# Allegro board my_demoa2.brd
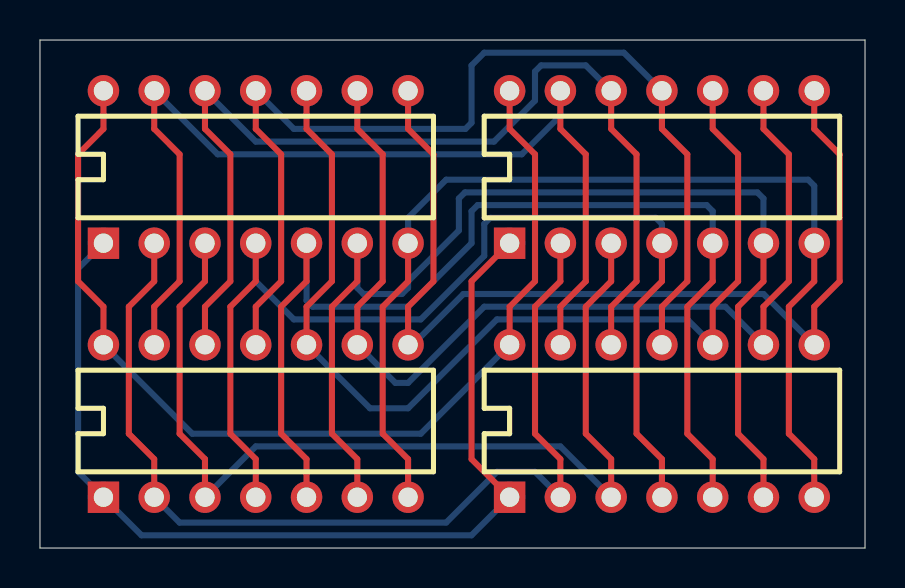
[diagram p0: board, top side]
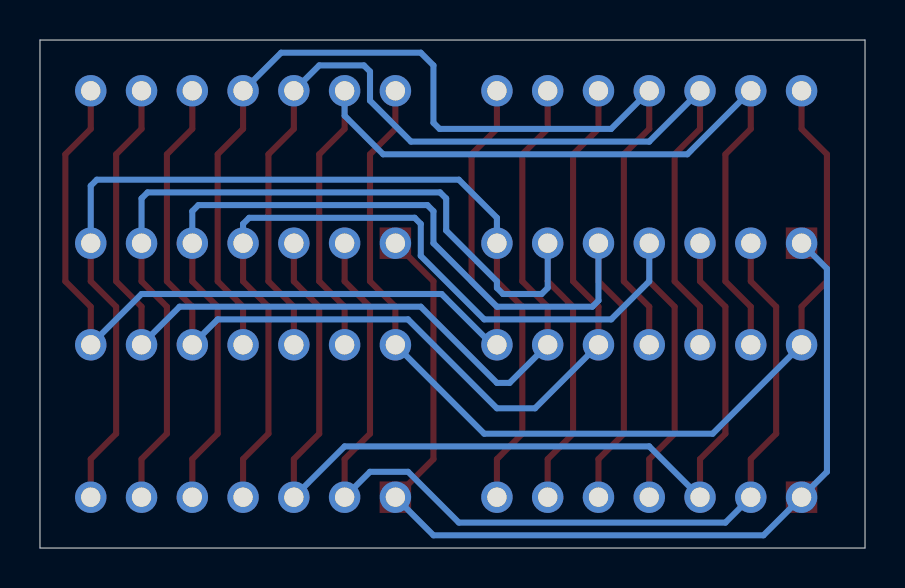
[diagram p1: board, bottom side, seen from below]

Outline 41.27 x 25.4 mm; copper layers: TOP, GND, POWER, INNER1, INNER2, BOTTOM. Coordinates in mm from the lower left corner of the outline.
Outline path: 0,25.4 0,0 41.27,0 41.27,25.4 0,25.4

## Design rules (mm)
nets with their own width: min track width 0.305; nets DAT1 DAT2 DAT3 DAT4 DAT5 DAT6 DAT7 DAT8 DAT9 DAT10 DAT11 DAT12 GND VCC

## Placement (name value [footprint] x y rotation side)
U1  7400  [DIP14]  3.17 15.24 0 top
U2  7400  [DIP14]  23.5 15.24 0 top
U3  7400  [DIP14]  3.17 2.54 0 top
U4  7400  [DIP14]  23.5 2.54 0 top

## Library data of the parts
U1-U4 = 7400

## Footprints (pads in the part's own frame, mm; a bottom-side part is the same pattern mirrored in y, then rotated)
DIP14
  rect 1.575x1.575 hole 0.965: 1(0,0)
  round 1.575 hole 0.965: 2(2.54,0) 3(5.08,0) 4(7.62,0) 5(10.16,0) 6(12.7,0) 7(15.24,0) 8(15.24,7.62) 9(12.7,7.62) 10(10.16,7.62) 11(7.62,7.62) 12(5.08,7.62) 13(2.54,7.62) 14(0,7.62)

## Nets
GND: U1.7(TP-7) U2.7(TP-7) U3.7(TP-7) U4.7(TP-7)
VCC: U1.14(TP-14) U2.14(TP-14) U3.14(TP-14) U4.14(TP-14)
DAT1: U1.2(TP-2) U2.2(TP-2) U3.2(TP-2) U4.2(TP-2)
DAT2: U1.1(TP-1) U2.1(TP-1) U3.1(TP-1) U4.1(TP-1)
DAT3: U1.3(TP-3) U2.3(TP-3) U3.3(TP-3) U4.3(TP-3)
DAT4: U1.5(TP-5) U2.5(TP-5) U3.5(TP-5) U4.5(TP-5)
DAT5: U1.4(TP-4) U2.4(TP-4) U3.4(TP-4) U4.4(TP-4)
DAT6: U1.6(TP-6) U2.6(TP-6) U3.6(TP-6) U4.6(TP-6)
DAT7: U1.10(TP-10) U2.10(TP-10) U3.10(TP-10) U4.10(TP-10)
DAT8: U1.9(TP-9) U2.9(TP-9) U3.9(TP-9) U4.9(TP-9)
DAT9: U1.8(TP-8) U2.8(TP-8) U3.8(TP-8) U4.8(TP-8)
DAT10: U1.13(TP-13) U2.13(TP-13) U3.13(TP-13) U4.13(TP-13)
DAT11: U1.12(TP-12) U2.12(TP-12) U3.12(TP-12) U4.12(TP-12)
DAT12: U1.11(TP-11) U2.11(TP-11) U3.11(TP-11) U4.11(TP-11)

## Routing (per net, layer and track width the routed paths; a pad name or vN(x,y) marks a point on that pad's centre or on a via; arc(x,y) is an arc through that point)
GND: length 52.9
  TOP w0.305: U1.7 18.42,13.34 17.15,12.06 17.15,5.71 18.42,4.45 U3.7 ; U4.7 38.73,4.45 37.46,5.71 37.46,12.06 38.73,13.34 U2.7
  BOTTOM w0.305: U2.7 38.73,18.11 38.43,18.41 20.32,18.41 18.42,16.51 U1.7
VCC: length 51.5
  TOP w0.305: U4.14 23.5,12.06 24.77,13.34 24.77,19.68 23.5,20.95 U2.14 ; U1.14 3.17,20.95 1.91,19.68 1.91,13.34 3.17,12.06 U3.14
  BOTTOM w0.305: U3.14 7.62,5.71 19.05,5.71 U4.14
DAT1: length 49.9
  TOP w0.305: U2.2 26.04,13.34 24.77,12.06 24.77,5.71 26.04,4.45 U4.2 ; U3.2 5.71,4.45 4.45,5.71 4.45,12.06 5.71,13.34 U1.2
  BOTTOM w0.305: U4.2 24.77,3.81 22.86,3.81 20.32,1.27 6.98,1.27 U3.2
DAT2: length 49.9
  TOP w0.305: U4.1 21.59,4.45 21.59,13.34 U2.1
  BOTTOM w0.305: U1.1 1.91,13.97 1.91,3.81 U3.1 5.08,0.64 21.59,0.64 U4.1
DAT3: length 49.9
  TOP w0.305: U1.3 8.26,13.34 6.98,12.06 6.98,5.71 8.26,4.45 U3.3 ; U4.3 28.58,4.45 27.31,5.71 27.31,12.06 28.58,13.34 U2.3
  BOTTOM w0.305: U3.3 10.79,5.08 26.04,5.08 U4.3
DAT4: length 55.6
  TOP w0.305: U3.5 13.33,4.45 12.06,5.71 12.06,12.06 13.33,13.34 U1.5 ; U4.5 33.66,4.45 32.38,5.71 32.38,12.06 33.66,13.34 U2.5
  BOTTOM w0.305: U1.5 13.33,12.37 13.64,12.06 18.42,12.06 21.59,15.24 21.59,16.84 21.89,17.14 33.35,17.14 33.66,16.84 U2.5
DAT5: length 54.7
  TOP w0.305: U2.4 31.12,13.34 29.85,12.06 29.85,5.71 31.12,4.45 U4.4 ; U3.4 10.79,4.45 9.53,5.71 9.53,12.06 10.79,13.34 U1.4
  BOTTOM w0.305: U1.4 10.79,13.34 12.7,11.43 19.05,11.43 22.23,14.61 22.23,16.21 22.53,16.51 30.81,16.51 31.12,16.21 U2.4
DAT6: length 55.8
  TOP w0.305: U4.6 36.2,4.45 34.92,5.71 34.92,12.06 36.2,13.34 U2.6 ; U1.6 15.88,13.34 14.61,12.06 14.61,5.71 15.88,4.45 U3.6
  BOTTOM w0.305: U1.6 15.88,13 16.18,12.7 18.11,12.7 18.42,13 18.42,13.34 20.96,15.88 20.96,17.48 21.26,17.78 35.89,17.78 36.2,17.48 U2.6
DAT7: length 51.5
  TOP w0.305: U4.10 33.66,12.06 34.92,13.34 34.92,19.68 33.66,20.95 U2.10 ; U3.10 13.33,12.06 14.61,13.34 14.61,19.68 13.33,20.95 U1.10
  BOTTOM w0.305: U4.10 32.38,11.43 22.86,11.43 18.42,6.99 16.51,6.99 U3.10
DAT8: length 51
  TOP w0.305: U1.9 15.88,20.95 17.15,19.68 17.15,13.34 15.88,12.06 U3.9 ; U4.9 36.2,12.06 37.46,13.34 37.46,19.68 36.2,20.95 U2.9
  BOTTOM w0.305: U4.9 34.29,12.06 22.23,12.06 18.42,8.26 17.78,8.26 U3.9
DAT9: length 49.9
  TOP w0.305: U3.8 18.42,12.06 19.69,13.34 19.69,19.68 18.42,20.95 U1.8 ; U2.8 38.73,20.95 40,19.68 40,13.34 38.73,12.06 U4.8
  BOTTOM w0.305: U3.8 18.64,10.16 21.18,12.7 36.2,12.7 U4.8
DAT10: length 51.2
  TOP w0.305: U3.13 5.71,12.06 6.98,13.34 6.98,19.68 5.71,20.95 U1.13 ; U4.13 26.04,12.06 27.31,13.34 27.31,19.68 26.04,20.95 U2.13
  BOTTOM w0.305: U2.13 26.04,21.62 24.1,19.68 8.89,19.68 U1.13
DAT11: length 51.8
  TOP w0.305: U1.12 8.26,20.95 9.53,19.68 9.53,13.34 8.26,12.06 U3.12 ; U4.12 28.58,12.06 29.85,13.34 29.85,19.68 28.58,20.95 U2.12
  BOTTOM w0.305: U1.12 10.79,20.32 22.72,20.32 24.77,22.37 24.77,23.83 25.07,24.13 27.31,24.13 U2.12
DAT12: length 52.7
  TOP w0.305: U2.11 31.12,20.95 32.38,19.68 32.38,13.34 31.12,12.06 U4.11 ; U3.11 10.79,12.06 12.06,13.34 12.06,19.68 10.79,20.95 U1.11
  BOTTOM w0.305: U2.11 29.21,24.77 22.23,24.77 21.59,24.13 21.59,21.26 21.29,20.95 12.7,20.95 U1.11
